# Altium PCB CMTestBoard.PcbDoc (part 2 of 2)
Units mil, origin at the board's own origin, x right, y up, seen from the top; angles counter-clockwise.
Board outline 3790 x 3730 mil, 4 copper layers (Top Layer, Layer 1, Layer 2, Bottom Layer), stack 22.4 mil thick; 114 components, 108 nets, 634 pads, 218 vias.
Unrouted connection lines stored in the file: 45.
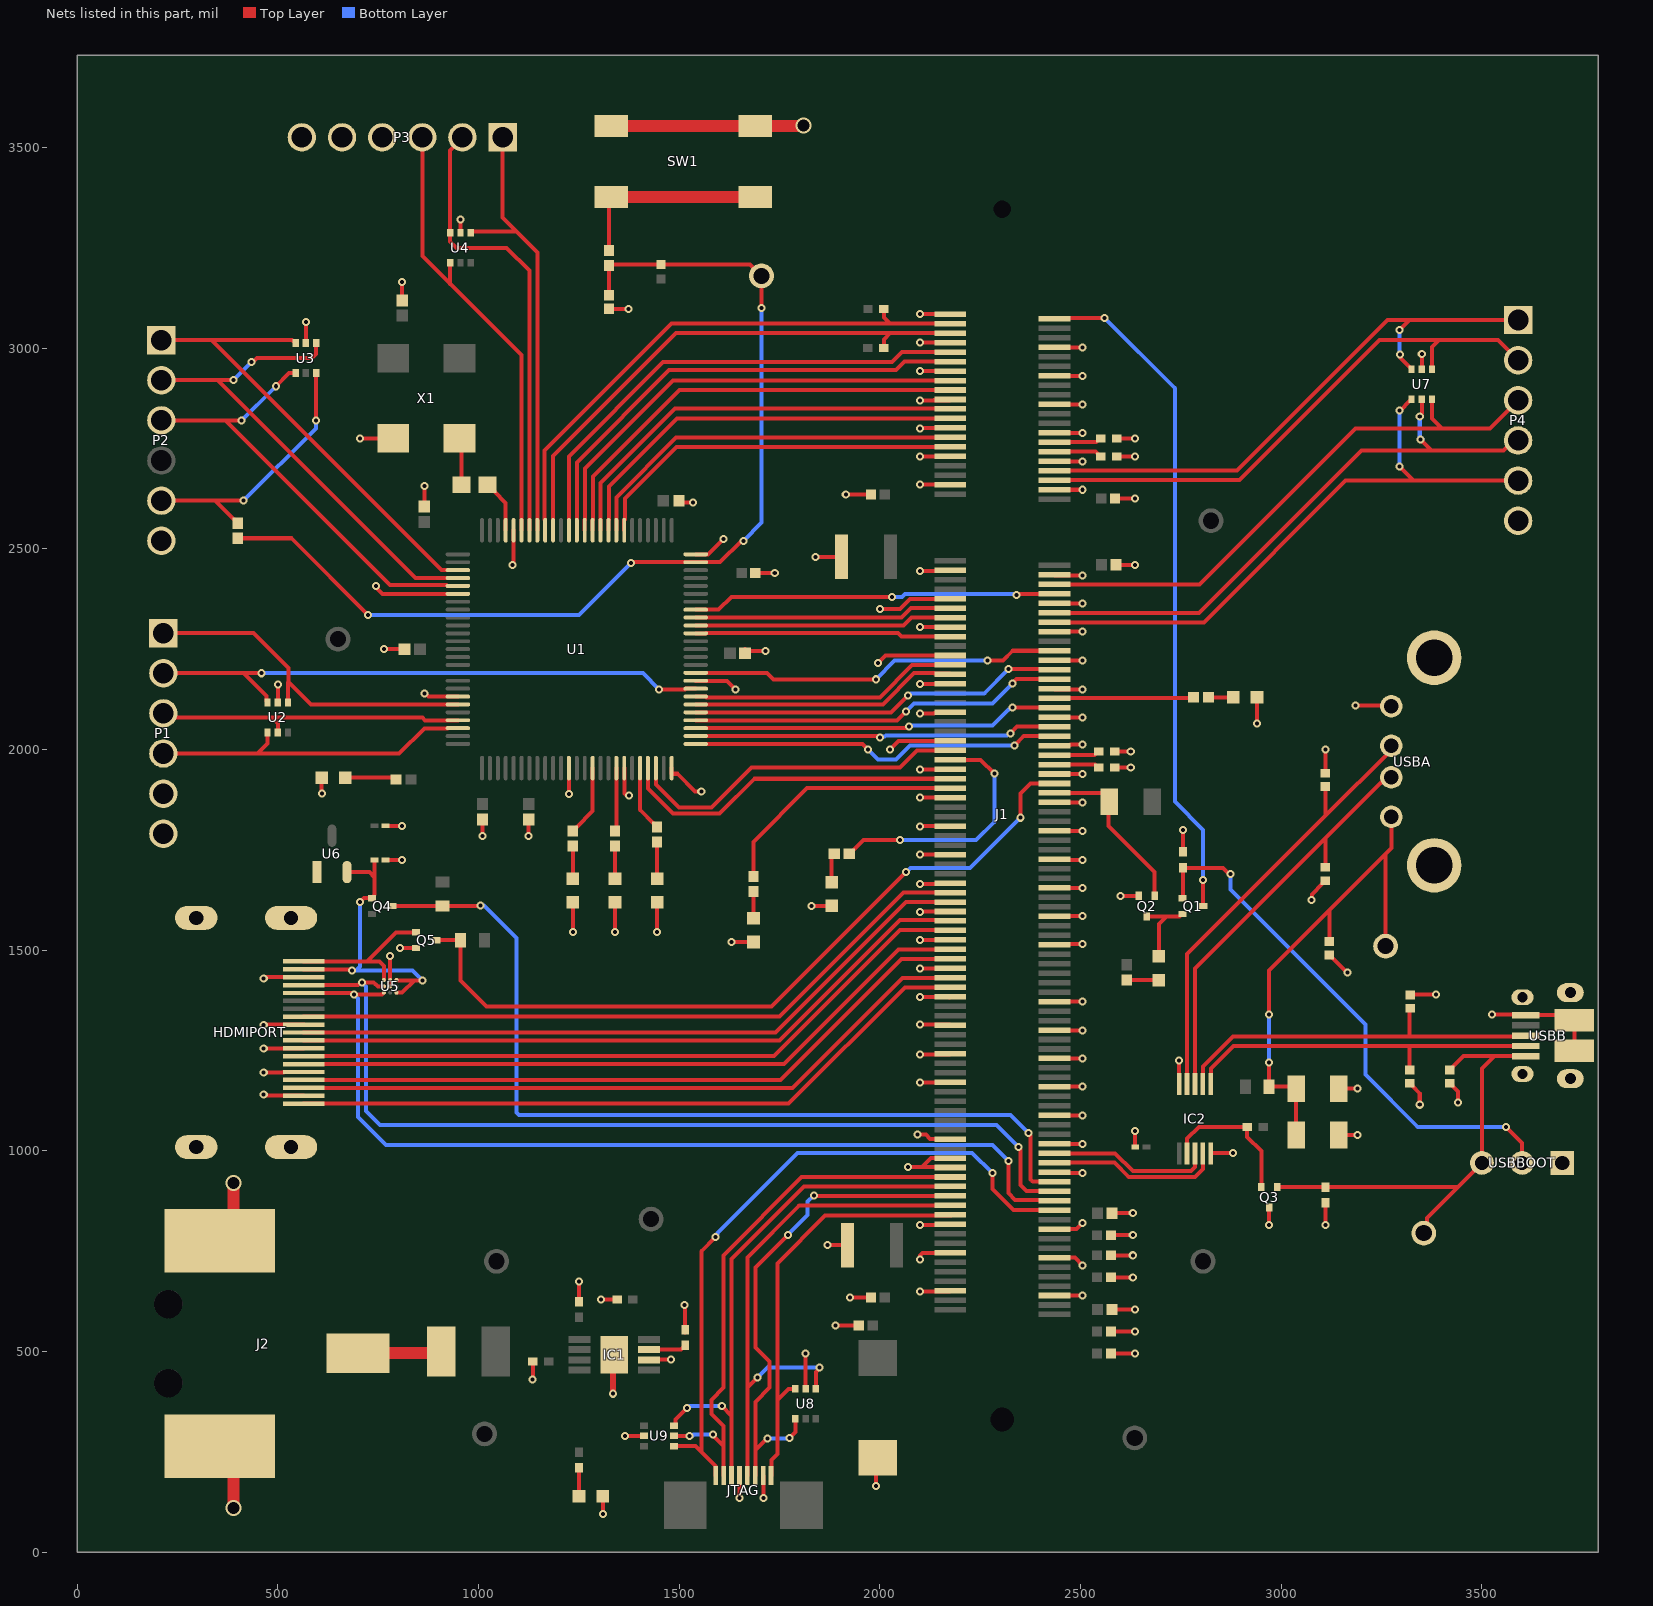
[diagram p2: the nets of this part, all layers, seen from the top]

## Via types
v1: diameter 20, hole 10, Top Layer to Bottom Layer, 215 vias
v2: diameter 40, hole 30, Top Layer to Bottom Layer, 3 vias

## Nets (pads, with @x,y where several pads share a name; then routed paths per layer and width w, separated by ;. In a path a pad name is that pad's centre, name@x,y a point inside that pad or via, vN(x,y) a via of type N, cw(c..) or ccw(c..) an arc to the next point about the centre after c; other vN are vias at no path point) (continued)
EMMC_DISABLE_IN: J1.2 Q1.3 | length 1692.6
  Top Layer w10: J1.2@2435,3072.8 2436.89,3074.69 2474.91,3074.69 2475.23,3075 v1(2560,3075) ; v1(2805,1675) 2805.59,1674.41 Q1.3@2805.59,1610
  Bottom Layer w10: v1(2560,3075) 2735,2900 2735,1870 2805,1800 v1(2805,1675)
EMMC_EN_N1.8V: J1.90 Q2.1 R18.1 | length 429.9
  Top Layer w10: J1.90@2435,1891.69 2555.2,1891.69 2570,1876.89 2570,1810 2684.68,1695.32 Q2.1@2684.68,1635.59
GCK1: SJ1.2 U1.22 | length 133.7
  Top Layer w10: SJ1.2@1022.48,2660 1024.45,2660 1040.12,2644.33 1040.12,2642.36 1067.83,2614.65 U1.22@1067.83,2546.26
GND: C1.1 C2.1 C3.1 C4.1 C5.1 C6.2 C7.2 C8.2 C9.2 C10.1 C11.2 C12.2 C13.2 C14.2 C15.1 C16.2 C17.2 C18.2 C19.2 C20.1 C21.1 C22.1 C23.1 C24.1 C25.1 C26.1 C27.1 C28.1 C29.1 C30.1 C31.1 C32.2 C33.2 D1.2 D2.2 D3.2 D4.2 D5.2 D6.2 DS1.2 DS2.2 DS3.2 DS4.1 DS5.1 DS6.1 HDMIPORT.2 HDMIPORT.5 HDMIPORT.8 HDMIPORT.11 HDMIPORT.17 HDMIPORT.Shell IC1.2 IC1.9 IC2.5 IC2.10 J1.1 J1.7 J1.8 J1.13 J1.14 J1.19 J1.20 J1.25 J1.26 J1.31 J1.32 J1.37 J1.38 J1.43 J1.44 J1.49 J1.50 J1.55 J1.56 J1.61 J1.62 J1.67 J1.68 J1.73 J1.74 J1.79 J1.80 J1.85 J1.86 J1.91 J1.92 J1.97 J1.98 J1.103 J1.104 J1.109 J1.110 J1.115 J1.116 J1.121 J1.122 J1.127 J1.133 J1.134 J1.139 J1.140 J1.145 J1.146 J1.151 J1.152 J1.157 J1.163 J1.164 J1.168 J1.169 J1.170 J1.181 J1.182 J1.187 J1.188 J1.195 J1.196 J2.2 J2.3 JTAG.4 JTAG.7 P1.5 P1.6 P2.6 P3.4 P3.5 P3.6 P4.6 PWR1.2 PWR2.2 Q2.2 Q3.3 Q5.2 R1.2 R2.2 R3.2 R4.2 R17.1 R22.1 SW1.3 SW1.4 U1.21 U1.31 U1.44 U1.62 U1.69 U1.75 U1.84 U1.100 U2.2 U3.2 U4.2 U5.B2 U5.C2 U6.1 U7.2 U8.2 U9.2 USBA.4 USBA.Shell USBB.5 USBB.6 USBB.7 USBB.8 USBB.9 USBB.10 USBB.11 USBBOOT.1 X1.2 | length 11160.8
  Top Layer w10: J2.3@355.31,264.09 J2.3@359.41,260 ; v1@463.34,1255.38 v1@463.72,1255 ; v1@463.81,1195.53 v1@464.86,1196.57 ; v1(465,1140) 467.71,1140 470.19,1137.52 HDMIPORT.2@564.64,1137.52 ; v1(465,1195.53) 513.97,1195.53 514.51,1196.06 564.13,1196.06 HDMIPORT.5@564.64,1196.57 ; v1(465,1255.38) 563.88,1255.38 564.13,1255.12 HDMIPORT.8@564.64,1255.63 ; v1(465,1313.25) 466.43,1314.68 HDMIPORT.11@564.64,1314.68 HDMIPORT.11@564.91,1314.42 ; v1(465,1430) 467.71,1430 470.5,1432.8 HDMIPORT.17@564.64,1432.8 ; U2.2@500,2117.5 v1(500,2162.5) ; U3.2@570,3012.4 v1@570,3063.89 ; PWR2.2@609.17,1930 609.17,1890.83 v1(610,1890) ; v1(705,2775) X1.2@787.32,2775 ; v1(745,2406.83) 745,2403.65 760.86,2387.8 U1.31@948.74,2387.8 ; v1(765,2250) C25.1@816.1,2250 ; C33.2@768.78,1725 v1(810,1725) ; C32.2@768.78,1810 v1(810,1810) ; U5.B2@780,1410 U5.C2@780,1425.75 v1(780,1485) ; v1(805,1505) 805.31,1505.31 Q5.2@844.41,1505.31 ; C28.1@810,3118.9 v1(810,3165) ; v1(865,2140) 867.71,2140 875.82,2131.89 U1.44@948.74,2131.89 ; C26.1@865,2605 v1(865,2656.1) ; U4.2@955,3287.4 v1(955,3320) ; v1(1010,1785) C24.1@1010,1826.1 ; v1(1085,2460) 1085,2462.71 1087.52,2465.23 U1.21@1087.52,2546.26 ; v1(1125,1785) C23.1@1125,1826.1 ; v1(1135,430) 1135.32,430.32 C3.1@1135.32,475 ; v1(1225,1889.31) 1225.32,1889.62 U1.62@1225.32,1953.74 ; v1(1235,1545) DS1.2@1235,1619.17 ; C1.1@1250,624.68 v1(1250,675) ; v1(1305,630) C4.1@1345.32,630 ; v1(1310,95) PWR1.2@1310,139.53 ; C27.1@1325,3098.07 1325.2,3097.87 v1(1373.65,3097.87) ; v1(1340,1545) DS2.2@1340,1619.17 ; U1.69@1363.27,1953.58 1363.27,1939.92 1363.33,1938.15 1363.33,1890.91 1369.24,1885 v1(1375,1885) ; v1(1365,290) U9.2@1412.6,290 ; IC1.2@1425,479.41 1425.59,480 v1(1480,480) ; v1(1445,1545) DS3.2@1445,1619.17 ; U1.75@1481.22,1953.74 1481.22,1939.68 1481.3,1939.6 1495.36,1939.6 1539.8,1895.16 1554.84,1895.16 v1(1555,1895) ; C20.1@1500,2615 v1(1535,2615) ; v1(1513.75,616.25) 1515,615 C2.1@1515,547.63 ; U1.84@1541.26,2171.26 1618.74,2171.26 v1(1640,2150) ; U1.100@1541.26,2486.22 1571.22,2486.22 v1(1610,2525) ; v1(1630,1520) 1684.53,1520 DS5.1@1685,1520.47 ; v1(1650,135) 1650.16,135.16 JTAG.4@1650.16,190.79 JTAG.4@1650.71,191.34 ; C22.1@1663.9,2250 1668.9,2245 v1(1715,2245) ; C21.1@1690,2440 v1(1738.07,2440) ; JTAG.7@1708.9,191.1 JTAG.7@1709.21,190.79 1710,190 v1(1710,135) ; U8.2@1815,407.4 v1(1815,495) ; v1(1830,1610) 1879.53,1610 DS6.1@1880,1610.47 ; v1(1840,2480) C14.2@1903.98,2480 ; v1(1870,765) C19.2@1918.98,765 ; v1(1890,565) C7.2@1947.68,565 C7.2@1950.56,565 ; v1(1915,2635) C13.2@1977.68,2635 ; v1(1925,635) C12.2@1977.68,635 ; v1(1990,165) 1990,230.98 C9.2@1995,235.98 ; v1(1995,2215) 2014.21,2234.21 J1.61@2175.16,2234.21 ; v1(2000,2350) 2050,2350 2075,2375 2174.21,2375 J1.49@2175.16,2375.94 ; v1(2025,2000) 2046.61,2021.61 J1.79@2175.16,2021.61 ; v1(2070,960) 2105,960 ; v1(2094.27,1040.39) 2114.61,1040.39 2125,1030 2174.65,1030 J1.164@2175.16,1029.49 ; v1@2098.86,1383.62 v1(2100,1383.62) J1.133@2173.27,1383.62 ; v1@2099.77,2162.98 2100.13,2163.35 J1.67@2175.16,2163.35 ; v1(2100,650) 2173.62,650 J1.196@2175.16,651.54 ; v1(2100,730) 2100,740 2106.02,746.02 J1.188@2175.16,746.02 ; v1(2100,815) 2173.27,815 J1.182@2175.16,816.89 ; v1(2100,1170) 2173.94,1170 J1.152@2175.16,1171.22 ; v1(2100,1240) 2134.93,1240 2135.13,1240.2 2173.27,1240.2 J1.146@2175.16,1242.09 ; v1(2100,1315) 2134.93,1315 2135.09,1314.84 2173.27,1314.84 J1.139@2175.16,1312.95 ; v1(2100,1455) 2174.84,1455 J1.127@2175.16,1454.68 ; v1(2100,1525) 2174.61,1525 J1.121@2175.16,1525.55 ; v1(2100,1595) 2101.42,1596.42 J1.115@2175.16,1596.42 ; v1(2100,1665) 2134.93,1665 2135.32,1665.39 2173.27,1665.39 J1.109@2175.16,1667.28 ; v1(2100,1880) 2100.12,1879.88 J1.91@2175.16,1879.88 ; v1(2100,1950) 2100.75,1950.75 J1.85@2175.16,1950.75 ; v1(2100,2090) 2134.93,2090 2135.52,2090.59 2173.27,2090.59 J1.73@2175.16,2092.48 ; v1(2100,2305) 2175.08,2305 J1.55@2175.16,2305.08 ; v1(2100,2445) 2173.35,2445 J1.43@2175.16,2446.81 ; v1(2100,2660) 2174.57,2660 J1.37@2175.16,2659.41 ; v1(2100,2730) 2174.88,2730 J1.31@2175.16,2730.28 ; v1(2100,2800) 2101.14,2801.14 J1.25@2175.16,2801.14 ; v1(2100,2870) 2134.93,2870 2135.05,2870.12 2173.27,2870.12 J1.19@2175.16,2872.01 ; v1(2100,2943.33) 2100.46,2942.87 J1.13@2175.16,2942.87 ; v1(2100,3013.79) 2100.05,3013.74 J1.7@2175.16,3013.74 ; v1(2100,3085) 2100.39,3084.61 J1.1@2175.16,3084.61 ; v1@2100.53,1738.25 2100.63,1738.15 J1.103@2175.16,1738.15 ; v1@2100.72,1807.9 2101.84,1809.02 J1.97@2175.16,1809.02 ; J1.133@2173.27,1381.93 J1.133@2175.16,1383.82 ; J1.170@2175.16,958.62 2173.78,960 2105,960 ; J1.168@2175.16,982.24 2127.24,982.24 2105,960 ; J1.195@2435,639.72 2435.28,640 v1(2505,640) ; J1.187@2435,734.21 2485.79,734.21 v1(2505,715) ; J1.181@2435,805.08 2490.08,805.08 v1(2505,820) ; J1.169@2435,946.81 2436.81,945 v1@2500,945 ; J1.163@2435,1017.68 2435.15,1017.53 v1@2502.55,1017.53 ; J1.157@2435,1088.54 2500.9,1088.54 v1@2501.44,1088 ; J1.151@2435,1159.41 2435.59,1160 v1@2500,1160 ; J1.145@2435,1230.28 2435.28,1230 v1@2500,1230 ; J1.140@2435,1301.14 2436.14,1300 v1@2500,1300 ; J1.134@2435,1372.01 v1@2498.5,1372.02 ; J1.122@2435,1513.74 2436.26,1515 v1(2505,1515) ; J1.116@2435,1584.61 2435.39,1585 v1(2505,1585) ; J1.110@2435,1655.47 2435.47,1655 v1(2505,1655) ; J1.104@2435,1726.34 2436.34,1725 v1(2505,1725) ; J1.98@2435,1797.2 2435.5,1796.71 v1(2505,1796.71) ; J1.92@2435,1868.07 2435.41,1867.66 v1(2505,1867.66) ; J1.86@2435,1938.94 J1.86@2435,1938.94 v1(2505,1938.89) ; J1.80@2435,2009.8 2436.89,2011.69 2474.47,2011.69 2475.23,2012.45 v1(2505,2012.45) ; J1.74@2435,2080.67 2435.67,2080 v1(2505,2080) ; J1.68@2435,2151.54 2436.54,2150 v1(2505,2150) ; J1.62@2435,2222.4 2435.58,2221.82 v1(2505,2221.82) ; J1.56@2435,2293.27 2435.45,2293.72 v1(2505,2293.72) ; J1.50@2435,2364.13 2435.19,2363.95 v1(2505,2363.95) ; J1.44@2435,2435 2436.15,2433.85 v1(2505,2433.85) ; J1.38@2435,2647.6 2435.46,2647.14 v1(2505,2647.14) ; J1.32@2435,2718.46 2435.55,2717.91 v1(2505,2717.91) ; J1.26@2435,2789.33 2435.38,2788.95 v1(2505,2788.95) ; J1.20@2435,2860.2 2435.2,2860 v1(2505,2860) ; J1.14@2435,2931.06 2435.29,2930.77 v1(2505,2930.77) ; J1.8@2435,3001.93 2435.39,3001.54 v1(2505,3001.54) ; C18.2@2577.32,685 v1(2630,685) ; C17.2@2577.32,740 v1(2630,740) ; C16.2@2577.32,790 v1(2630,790) ; C15.1@2578.11,845 v1(2630,845) ; C8.2@2582.32,495 v1(2635,495) ; C6.2@2582.32,550 v1(2635,550) ; C5.1@2583.11,605 v1(2635,605) ; R4.2@2584.69,1955 v1(2625,1955) ; R3.2@2584.69,1995 v1(2625,1995) ; C11.2@2585.94,2625 v1(2635,2625) ; C10.1@2588.31,2460 v1(2635,2460) ; R2.2@2589.69,2730 v1(2635,2730) ; R1.2@2589.69,2775 v1(2635,2775) ; v1(2600,1635) 2644.72,1635 Q2.2@2645.31,1635.59 ; v1(2635,1050) 2635,1010.91 2635.91,1010 C29.1@2636.22,1010 ; v1(2745,1225) 2745,1167.24 IC2.10@2745.63,1166.61 ; R17.1@2755,1744.68 v1(2755,1800) ; IC2.5@2824.37,993.39 2824.37,994.09 2825.28,995 v1(2880,995) ; DS4.1@2939.53,2130 2940,2129.53 v1(2940,2065) ; v1(2970,815) Q3.3@2970,859.41 ; v1(3075,1625) 3076.04,1626.04 3076.04,1639.31 3103.19,1666.46 3103.19,1667.44 3109.02,1673.27 D2.2@3110,1673.27 ; v1(3110,815) R22.1@3110,870.32 ; D3.2@3110,1941.22 v1(3110,2000) ; D1.2@3120,1488.27 3120.98,1488.27 3126.81,1482.44 3126.81,1481.46 3163.27,1445 v1(3165,1445) ; C30.1@3143.15,1040 v1(3190,1040) ; C31.1@3143.15,1155 v1(3190,1155) ; v1(3185,2110) 3271.97,2110 USBA.4@3274.17,2107.8 ; D5.2@3320,1168.27 3320.98,1168.27 3326.81,1162.44 3326.81,1161.46 3345,1143.27 v1(3345,1115) ; D6.2@3320.87,1388.48 3322.38,1390 v1(3385,1390) ; U7.2@3350,2947.4 v1(3350,2985) ; D4.2@3420,1168.27 3420.98,1168.27 3426.81,1162.44 3426.81,1161.46 3440,1148.27 v1(3440,1120) ; v1(3525,1340) 3607.22,1340 USBB.5@3608.94,1338.29 3716.71,1338.29 USBB.11@3730,1325 USBB.10@3730,1249.21
  Top Layer w15: PWR1.2@1309.53,140 PWR1.2@1310,139.53 ; v1(1335,395) IC1.9@1335,488.82
  Top Layer w30: J2.2@355.31,775.91 390,810.59 v2(390,920) ; J2.3@359.41,260 400,219.41 390,209.41 v2(390,110) ; SW1.3@1330.5,3553.5 SW1.4@1689.5,3553.5 1808.5,3553.5 v2(1810,3555) ; IC1.9@1335,488.82 IC1.9@1338.39,492.2
  other v1: 2505,945 2505,1017.53 2505,1088 2505,1160 2505,1230 2505,1300 2505,1372.02 2100,1738.25 2100,1807.9 2100,2162.98 570,3065
GP1: J1.34 P4.1 U7.3 | length 1456
  Top Layer w10: J1.34@2435,2694.84 2889.84,2694.84 3265,3070 3320,3070 ; v1(3295,3045) 3320,3070 ; v1(3296.25,2983.75) 3296.25,2976.74 3325,2947.99 U7.3@3324.41,2947.4 ; P4.1@3590,3070 3320,3070
  Bottom Layer w10: v1(3295,3045) 3295,2985 v1(3296.25,2983.75)
GP2: J1.36 P4.2 U7.1 | length 1399.8
  Top Layer w10: J1.36@2435,2671.22 2896.22,2671.22 3245,3020 3392.5,3020 ; U7.1@3375.59,2947.4 3375.59,3003.09 3392.5,3020 ; P4.2@3590,2970 3540,3020 3392.5,3020
GP3: J1.46 P4.3 U7.6 | length 1427.7
  Top Layer w10: J1.46@2435,2411.38 2796.38,2411.38 3185,2800 3400,2800 ; U7.6@3375.59,2872.6 3375.59,2824.41 3400,2800 ; P4.3@3590,2870 3520,2800 3400,2800
GP4: J1.52 P4.4 U7.5 | length 1479.5
  Top Layer w10: J1.52@2435,2340.51 2795.51,2340.51 3200,2745 3374.16,2745 ; v1(3345,2830) 3345,2832.71 3350,2837.71 U7.5@3350,2872.6 ; v1(3347.12,2772.04) 3374.16,2745 ; P4.4@3590,2770 3578.71,2770 3553.71,2745 3374.16,2745
  Bottom Layer w10: v1(3345,2830) 3345,2780.1 3351.3,2773.8 3349.54,2772.04 v1(3347.12,2772.04)
GP5: J1.54 P4.5 U7.4 | length 1532.8
  Top Layer w10: J1.54@2435,2316.89 2806.89,2316.89 3160,2670 3330,2670 ; v1(3295,2705) 3330,2670 ; v1(3295,2845) 3296.81,2845 3319.57,2867.76 3321.54,2867.76 3324.41,2870.63 U7.4@3324.41,2872.6 ; P4.5@3590,2670 3330,2670
  Bottom Layer w10: v1(3295,2705) v1(3295,2845)
GP6: P3.1 U1.18 U4.1 | length 1130.1
  Top Layer w10: U4.1@980.59,3287.4 983.19,3290 1095,3290 ; P3.1@1060,3525 1060,3325 1095,3290 ; U1.18@1146.57,2546.26 1146.57,3238.43 1095,3290
GP7: P3.2 U1.19 U4.3 | length 1146.4
  Top Layer w10: P3.2@960,3525 960,3523.14 929.41,3492.55 U4.3@929.41,3287.4 929.41,3265.59 945,3250 1070,3250 1126.89,3193.11 U1.19@1126.89,2546.26
GP8: P3.3 U1.20 U4.4 | length 1133.7
  Top Layer w10: P3.3@860,3525 860,3230 929.41,3160.59 ; 929.41,3160 929.41,3160.59 ; U4.4@929.41,3212.6 929.41,3160.59 ; U1.20@1107.2,2546.26 1107.2,2982.8 929.41,3160.59
GPS_EN: J1.57 U1.90 | length 637.7
  Top Layer w10: U1.90@1541.26,2289.37 1566.69,2289.37 1567.32,2290 2045,2290 2053.54,2281.46 J1.57@2175.16,2281.46
GPS_RX_3.3: J1.53 U1.91 | length 642
  Top Layer w10: U1.91@1541.26,2309.06 2059.06,2309.06 2078.7,2328.7 J1.53@2175.16,2328.7
GPS_TX_3.3: J1.51 U1.92 | length 643.7
  Top Layer w10: U1.92@1541.26,2328.74 2053.74,2328.74 2077.32,2352.32 J1.51@2175.16,2352.32
H5V: C33.1 HDMIPORT.18 Q4.1 U5.A1 U5.C1 U6.2 | length 819.5
  Top Layer w10: HDMIPORT.18@564.64,1452.48 681.17,1452.48 683.65,1450 v1(685,1450) ; U6.2@672.4,1694.7 728.23,1694.7 741.22,1681.71 ; v1(705,1620) 714.68,1629.68 Q4.1@734.41,1629.68 736.57,1629.68 739.45,1632.56 739.45,1636.65 741.22,1638.42 741.22,1681.71 ; C33.1@741.22,1725 741.22,1681.71 ; U5.A1@795.75,1394.25 809.25,1394.25 840,1425 v1(860,1425) 796.5,1425 U5.C1@795.75,1425.75
  Bottom Layer w10: v1(705,1620) 705,1460 695,1450 835,1450 v1(860,1425)
HDMI_CEC: J1.171 Q4.3 R24.1 | length 2254.5
  Top Layer w10: Q4.3@785.59,1610 786.06,1610.47 R24.1@910,1610.47 1004.12,1610.47 v1(1005.25,1611.6) ; v1(2370,1045) 2370,1042.29 2375,1037.29 2375,929.05 2380.86,923.19 J1.171@2435,923.19
  Bottom Layer w10: v1(1005.25,1611.6) 1013.4,1611.6 1095,1530 1095,1095.86 1100.86,1090 2325,1090 v1(2370,1045)
HDMI_CLK_N: HDMIPORT.12 J1.111 | length 1738.6
  Top Layer w10: HDMIPORT.12@564.64,1334.37 1749.37,1334.37 2058.66,1643.66 J1.111@2175.16,1643.66
HDMI_CLK_P: HDMIPORT.10 J1.113 | length 1745.1
  Top Layer w10: HDMIPORT.10@564.64,1295 1740.35,1295 2065.35,1620 2175.12,1620 J1.113@2175.16,1620.04
HDMI_D0_N: HDMIPORT.9 J1.117 | length 1735.6
  Top Layer w10: HDMIPORT.9@564.64,1275.31 1750.31,1275.31 2050,1575 2134.93,1575 2135.24,1574.69 2173.27,1574.69 J1.117@2175.16,1572.8
HDMI_D0_P: HDMIPORT.7 J1.119 | length 1740.9
  Top Layer w10: HDMIPORT.7@564.64,1235.94 1735.94,1235.94 2050,1550 2174.33,1550 J1.119@2175.16,1549.17
HDMI_D1_N: HDMIPORT.6 J1.123 | length 1728.8
  Top Layer w10: HDMIPORT.6@564.64,1216.26 1761.26,1216.26 2046.93,1501.93 J1.123@2175.16,1501.93
HDMI_D1_P: HDMIPORT.4 J1.125 | length 1735.4
  Top Layer w10: HDMIPORT.4@564.64,1176.89 1751.89,1176.89 2053.31,1478.31 J1.125@2175.16,1478.31
HDMI_D2_N: HDMIPORT.3 J1.129 | length 1723.9
  Top Layer w10: HDMIPORT.3@564.64,1157.2 1782.2,1157.2 2056.06,1431.06 J1.129@2175.16,1431.06
HDMI_D2_P: HDMIPORT.1 J1.131 | length 1730.5
  Top Layer w10: HDMIPORT.1@564.64,1117.83 1772.83,1117.83 2062.44,1407.44 J1.131@2175.16,1407.44
HDMI_HPD_N_1V8: J1.88 Q5.3 R23.1 | length 1931.8
  Top Layer w10: Q5.3@895.59,1525 R23.1@955.47,1525 955.47,1424.53 1020,1360 1730,1360 v1(2065,1695) ; v1(2350,1830) 2350,1890 2375.32,1915.32 J1.88@2435,1915.32
  Bottom Layer w10: v1(2065,1695) 2065.86,1695 2075.86,1705 2225,1705 v1(2350,1830)
HDMI_SCL: HDMIPORT.15 J1.175 U5.A3 | length 2380.4
  Top Layer w10: HDMIPORT.15@564.64,1393.43 685.22,1393.43 688.65,1390 v1(690,1390) 691.35,1390 692.31,1390 694.78,1390 760,1390 U5.A3@764.25,1394.25 ; v1(2320,975) 2320,895 2337.05,877.95 2394.77,877.95 2394.89,877.83 2433.11,877.83 J1.175@2435,875.94
  Bottom Layer w10: v1(690,1390) 700,1380 700,1085 770,1015 2280,1015 v1(2320,975)
HDMI_SDA: HDMIPORT.16 J1.173 U5.B3 | length 2382.3
  Top Layer w10: HDMIPORT.16@564.64,1413.11 700.4,1413.11 707.29,1420 v1(710,1420) 738.09,1420 744.04,1414.04 745,1415 750,1410 U5.B3@764.25,1410 ; v1(2345,1010) 2345,1007.29 2350,1002.29 2350,915 2365.43,899.57 J1.173@2435,899.57
  Bottom Layer w10: v1(710,1420) 710,1419.14 720,1409.14 720,1100 755,1065 2290,1065 v1(2345,1010)
HPD: HDMIPORT.19 Q5.1 U5.C3 | length 391.6
  Top Layer w10: HDMIPORT.19@564.64,1472.17 722.17,1472.17 ; U5.C3@764.25,1425.75 764.25,1460.75 752.84,1472.17 722.17,1472.17 ; Q5.1@844.41,1544.68 794.68,1544.68 722.17,1472.17
HSD1+: D6.1 IC2.7 USBB.3 | length 949.8
  Top Layer w10: IC2.7@2804.68,1166.61 2804.68,1209.68 2880,1285 3320,1285 ; D6.1@3320.87,1355.02 3320,1354.15 3320,1285 ; USBB.3@3608.94,1287.11 3606.83,1285 3320,1285
HSD1-: D5.1 IC2.6 USBB.2 | length 905.8
  Top Layer w10: IC2.6@2824.37,1166.61 2825,1167.24 2825,1205 2881.52,1261.52 3320,1261.52 ; D5.1@3320,1201.73 3320,1261.52 ; USBB.2@3608.94,1261.52 3320,1261.52
HSD2+: D3.1 IC2.9 USBA.3 | length 1126.3
  Top Layer w10: IC2.9@2765.32,1166.61 2765.32,1490.32 3110,1835 ; D3.1@3110,1907.76 3110,1835 ; USBA.3@3274.17,2009.37 3274.17,1999.17 3110,1835
HSD2-: D2.1 IC2.8 USBA.2 | length 1047.8
  Top Layer w10: IC2.8@2785,1166.61 2785,1455 3110,1780 ; D2.1@3110,1706.73 3110,1780 ; USBA.2@3274.17,1930.63 3261.75,1930.63 3248.15,1917.03 3247.03,1917.03 3110,1780
LED1: R13.2 U1.65 | length 177.4
  Top Layer w10: R13.2@1235,1797.4 1235,1798.39 1242.8,1806.18 1243.78,1806.18 1284.37,1846.77 U1.65@1284.37,1953.74
LED2: R14.2 U1.68 | length 157.8
  Top Layer w10: R14.2@1340,1797.4 1343.43,1800.83 U1.68@1343.43,1953.74
LED3: R15.2 U1.71 | length 164.5
  Top Layer w10: U1.71@1402.48,1953.74 1402.48,1849.92 1436.22,1816.18 1437.2,1816.18 1445,1808.39 R15.2@1445,1807.4
LED4: J1.70 R25.2 | length 347.2
  Top Layer w10: J1.70@2435,2127.91 2779.21,2127.91 R25.2@2781.3,2130
LED5: J1.89 R26.2 | length 631.8
  Top Layer w10: R26.2@1685,1683.7 1685,1770 1818.5,1903.5 J1.89@2175.16,1903.5
LED6: J1.83 R27.2 | length 639.1
  Top Layer w10: R27.2@1923.7,1740 1924.69,1740 1932.48,1747.8 1932.48,1748.78 1958.7,1775 v1(2050,1775) ; J1.83@2175.16,1974.37 2250.63,1974.37 v1(2285,1940)
  Bottom Layer w10: v1(2050,1775) 2240,1775 2285,1820 v1(2285,1940)
MISO: J1.60 U1.85 | length 929.8
  Top Layer w10: U1.85@1541.26,2190.94 1719.06,2190.94 1735,2175 v1(1990,2175) ; v1(2267.7,2221.74) 2306.74,2221.74 2331.02,2246.02 J1.60@2435,2246.02
  Bottom Layer w10: v1(1990,2175) 2036.74,2221.74 v1(2267.7,2221.74)
MISO2: P2.3 U1.30 U3.4 | length 1137.3
  Top Layer w10: P2.3@210,2820 370,2820 ; v1(410,2820) 370,2820 ; v1(495,2905) 527.39,2937.39 544.2,2937.39 U3.4@544.41,2937.6 ; U1.30@948.74,2407.48 923.31,2407.48 920.79,2410 780,2410 370,2820
  Bottom Layer w10: v1(410,2820) 490,2900 492.29,2900 497.29,2905 v1(495,2905)
MOSI: J1.64 U1.80 | length 938.8
  Top Layer w10: U1.80@1541.26,2092.52 2027.52,2092.52 v1(2070,2135) ; v1(2320,2200) 2433.78,2200 J1.64@2435,2198.78
  Bottom Layer w10: v1(2070,2135) 2072.71,2135 2077.71,2140 2260,2140 v1(2320,2200)
MOSI2: P2.2 U1.29 U3.1 | length 1242.4
  Top Layer w10: P2.2@210,2920 350,2920 ; v1(390,2920) 350,2920 ; v1(435,2965) 437.71,2965 447.71,2975 585,2975 595.59,2985.59 U3.1@595.59,3012.4 ; U1.29@948.74,2427.17 842.83,2427.17 350,2920
  Bottom Layer w10: v1(390,2920) v1(435,2965)
NetC2_2: C2.2 IC1.3 | length 95.4
  Top Layer w10: IC1.3@1425,505 1504.69,505 1508.19,508.5 1510.16,508.5 1515,513.35 C2.2@1515,515.31
NetDS1_1: DS1.1 R13.1 | length 81.8
  Top Layer w10: DS1.1@1235,1678.23 R13.1@1235,1760
NetDS2_1: DS2.1 R14.1 | length 81.8
  Top Layer w10: DS2.1@1340,1678.23 R14.1@1340,1760
NetDS3_1: DS3.1 R15.1 | length 91.8
  Top Layer w10: DS3.1@1445,1678.23 R15.1@1445,1770
NetDS4_2: DS4.2 R25.1 | length 61.8
  Top Layer w10: R25.1@2818.7,2130 DS4.2@2880.47,2130
NetDS5_2: DS5.2 R26.1 | length 66.8
  Top Layer w10: DS5.2@1685,1579.53 R26.1@1685,1646.3
NetDS6_2: DS6.2 R27.1 | length 66.8
  Top Layer w10: DS6.2@1880,1669.53 R27.1@1880,1736.3
NetDS7_1: DS7.1 R19.1 | length 80.3
  Top Layer w10: R19.1@2615,1426.3 2694.17,1426.3 DS7.1@2695,1425.48
NetF1_1: F1.1 J2.1 | length 208.8
  Top Layer w30: J2.1@699.8,496.38 903.46,496.38 F1.1@907.09,500
NetJ1_28: J1.28 R1.1 | length 119.2
  Top Layer w10: J1.28@2435,2765.71 2539.06,2765.71 2548.35,2775 R1.1@2550.32,2775
NetJ1_30: J1.30 R2.1 | length 121.1
  Top Layer w10: J1.30@2435,2742.09 2537.65,2742.09 2543.5,2736.23 2543.5,2734.84 2548.35,2730 R2.1@2550.32,2730
NetJ1_82: J1.82 R3.1 | length 114
  Top Layer w10: J1.82@2435,1986.18 2534.53,1986.18 2543.35,1995 R3.1@2545.32,1995
NetJ1_84: J1.84 R4.1 | length 113.4
  Top Layer w10: J1.84@2435,1962.56 2535.79,1962.56 2543.35,1955 R4.1@2545.32,1955
NetPWR1_1: PWR1.1 R7.2 | length 70.5
  Top Layer w10: PWR1.1@1250,140.48 R7.2@1250,210.31
  Top Layer w30: PWR1.1@1250,140.48 PWR1.1@1250.48,140
NetPWR2_1: PWR2.1 R16.1 | length 128.8
  Top Layer w10: PWR2.1@668.23,1930 790,1930 R16.1@795,1925
NetQ1_1: Q1.1 R17.2 USBBOOT.2 | length 1350.7
  Top Layer w10: Q1.1@2754.41,1629.68 2755,1630.28 R17.2@2755,1705.31 2854.69,1705.31 2870,1690 v1(2873.75,1690) ; v1(3560,1060) 3600,1020 USBBOOT.2@3600,970
  Bottom Layer w10: v1(2873.75,1690) 2873.75,1651.25 3210,1315 3210,1190 3340,1060 v1(3560,1060)
NetR12_1: R12.1 SW1.1 SW1.2 | length 494.1
  Top Layer w10: R12.1@1325,3243.7 1325,3371 SW1.1@1330.5,3376.5
  Top Layer w30: SW1.1@1330.5,3376.5 SW1.2@1689.5,3376.5
NetSJ1_1: SJ1.1 X1.3 | length 117
  Top Layer w10: X1.3@952.68,2775 957.52,2770.16 SJ1.1@957.52,2660
RST: C27.2 R10.2 R11.1 R12.2 TP6.1 U1.99 | length 2561
  Top Layer w10: R10.2@400,2526.3 533.7,2526.3 v1(725,2335) ; C27.2@1325,3131.93 R12.2@1325,3206.3 1326.5,3207.8 R11.1@1455,3207.8 1676.17,3207.8 1703.97,3180 TP6.1@1705,3180 v1(1705,3100) ; v1(1380,2465) 1381.54,2466.54 U1.99@1541.26,2466.54 1601.54,2466.54 1655,2520 v1(1660,2520)
  Bottom Layer w10: v1(725,2335) 1250,2335 v1(1380,2465) ; v1(1660,2520) 1705,2565 v1(1705,3100)
RST_OUT: P2.5 R10.1 U3.6 | length 677.6
  Top Layer w10: P2.5@210,2620 343.7,2620 ; R10.1@400,2563.7 400,2564.69 392.2,2572.48 391.22,2572.48 343.7,2620 ; v1(415,2620) 343.7,2620 ; v1(595,2820) 595,2937.01 U3.6@595.59,2937.6
  Bottom Layer w10: v1(415,2620) 595,2800 v1(595,2820)
RUN: J1.177 JTAG.1 U9.4 | length 1714.7
  Top Layer w10: U9.4@1487.4,264.41 1540.59,264.41 1555,250 ; v1(1590,785) 1555,750 1555,250 ; JTAG.1@1591.1,190.79 1590.2,191.69 1590.2,214.8 1555,250 ; v1(2280,945) 2280,905 2332.68,852.32 J1.177@2435,852.32
  Bottom Layer w10: v1(1590,785) 1590,787.71 1595,792.71 1595,795 1795,995 2230,995 v1(2280,945)
SARA_EN: J1.48 U1.93 | length 912.3
  Top Layer w10: U1.93@1541.26,2348.43 1598.43,2348.43 1630,2380 v1(2030,2380) ; v1(2340,2385) 2342.71,2385 2345.46,2387.76 J1.48@2435,2387.76
  Bottom Layer w10: v1(2030,2380) 2055,2380 2062.71,2387.71 2334.59,2387.71 2337.29,2385 v1(2340,2385)
SCL: J1.5 R6.2 U1.16 | length 1344.5
  Top Layer w10: U1.16@1185.94,2546.26 1185.94,2730.94 1492.36,3037.36 2025,3037.36 ; R6.2@2009.69,3000 2009.69,3022.05 2025,3037.36 ; J1.5@2175.16,3037.36 2025,3037.36
SCLK: J1.66 U1.79 | length 936.1
  Top Layer w10: U1.79@1541.26,2072.83 2042.83,2072.83 v1(2065,2095) ; v1(2330,2165) 2330.7,2165 2340.86,2175.16 J1.66@2435,2175.16
  Bottom Layer w10: v1(2065,2095) 2085,2115 2280,2115 v1(2330,2165)
SCLK2: P2.1 U1.28 U3.3 | length 1189.9
  Top Layer w10: P2.1@210,3020 335,3020 ; U3.3@544.41,3012.4 544.41,3014.37 541.54,3017.24 538.43,3017.24 535.68,3020 335,3020 ; U1.28@948.74,2446.85 U1.28@948.74,2446.85 908.1,2446.9 335,3020
SDA: J1.3 R5.2 U1.17 | length 1382.7
  Top Layer w10: U1.17@1166.26,2546.26 1166.26,2571.69 1165,2572.95 1165,2745 1480.98,3060.98 2025,3060.98 ; R5.2@2009.76,3097.06 2009.76,3076.23 2025,3060.98 ; J1.3@2175.16,3060.98 2025,3060.98
SEL: IC2.2 Q3.2 R21.2 | length 363.4
  Top Layer w10: IC2.2@2765.32,993.39 2765.32,1030.32 2795,1060 R21.2@2915.31,1060 2915,1059.68 2915,1035 2950.31,999.69 Q3.2@2950.31,910.59
TC1: J1.63 U1.82 | length 668.1
  Top Layer w10: U1.82@1541.26,2131.89 1566.69,2131.89 1568.58,2130 2000,2130 2080.59,2210.59 J1.63@2175.16,2210.59
TC2: J1.65 U1.81 | length 667.4
  Top Layer w10: U1.81@1541.26,2112.2 2007.2,2112.2 2085,2190 2134.93,2190 2136.07,2188.86 2173.27,2188.86 J1.65@2175.16,2186.97
TC3: J1.81 U1.73 | length 857.2
  Top Layer w10: U1.73@1441.85,1953.74 1441.85,1913.15 1500,1855 1580,1855 1680,1955 2050,1955 2092.99,1997.99 J1.81@2175.16,1997.99
TC4: J1.87 U1.72 | length 866
  Top Layer w10: U1.72@1422.17,1953.74 1422.17,1902.83 1485,1840 1600,1840 1687.13,1927.13 J1.87@2175.16,1927.13
TC5: J1.29 U1.7 | length 943.1
  Top Layer w10: U1.7@1363.11,2546.26 1363.11,2571.69 1365,2573.58 1365,2625 1493.9,2753.9 J1.29@2175.16,2753.9
TCK: J1.180 JTAG.8 U8.3 | length 1075.5
  Top Layer w10: JTAG.8@1728.9,190.79 1729.8,191.69 1729.8,229.8 1745,245 1745,380 ; U8.3@1789.41,407.4 1772.39,407.39 1745,380 ; J1.180@2175.16,840.51 2177.05,838.62 1863.62,838.62 1745,720 1745,380
TDI: J1.174 JTAG.3 U9.6 | length 1340
  Top Layer w10: U9.6@1487.4,315.59 1488.09,315.59 1490.96,318.46 1490.96,330.96 v1(1520,360) ; v1(1606.07,364.34) 1630.47,339.93 ; JTAG.3@1630.47,190.79 1630.47,730.47 1811.38,911.38 J1.174@2175.16,911.38
  Bottom Layer w10: v1(1520,360) 1522.71,360 1527.05,364.34 v1(1606.07,364.34)
TDO: J1.178 JTAG.5 U8.1 | length 1362.4
  Top Layer w10: JTAG.5@1669.84,190.79 1670,190.94 1670,400 1670,410 ; v1(1695,435) 1670,410 ; U8.1@1840.59,407.4 1840.59,449.14 1850,458.55 v1(1850,460) ; J1.178@2175.16,864.13 1799.13,864.13 1670,735 1670,410
  Bottom Layer w10: v1(1695,435) 1722.8,462.8 1725.59,460 v1(1850,460)
TMS: J1.176 JTAG.6 U8.4 | length 1284.1
  Top Layer w10: JTAG.6@1689.53,190.79 1690,191.26 1690,255 ; v1(1719.62,283.23) 1718.23,283.23 1690,255 ; v1(1771.38,790) 1770.86,790 1690,709.14 1690,510 1725,475 1725,410 1690,375 1690,255 ; v1(1775,285) 1789.41,299.41 U8.4@1789.41,332.6 ; v1(1835.28,888.85) 1835.28,887.42 1837.71,885 1840.46,887.76 J1.176@2175.16,887.76
  Bottom Layer w10: v1(1719.62,283.23) 1773.23,283.23 v1(1775,285) ; v1(1771.38,790) 1770,790 1820,840 1820,873.56 v1(1835.28,888.85)
TOG1: J1.9 U1.14 | length 1241.8
  Top Layer w10: U1.14@1225.32,2546.26 1225.32,2571.69 1225,2572.01 1225,2730 1460,2965 2030,2965 2055.12,2990.12 J1.9@2175.16,2990.12
TOG2: J1.11 U1.13 | length 1203.1
  Top Layer w10: U1.13@1245,2546.26 1245,2715 1475,2945 2040,2945 2061.5,2966.5 J1.11@2175.16,2966.5
TOG3: J1.15 U1.12 | length 1154.8
  Top Layer w10: U1.12@1264.69,2546.26 1264.69,2571.69 1265,2572.01 1265,2700 1484.25,2919.25 J1.15@2175.16,2919.25
TOG4: J1.17 U1.11 | length 1113.5
  Top Layer w10: U1.11@1284.37,2546.26 1284.37,2571.69 1285,2572.32 1285,2680 1500.63,2895.63 J1.17@2175.16,2895.63
TOG5: J1.21 U1.10 | length 1066.6
  Top Layer w10: U1.10@1304.06,2546.26 1304.06,2664.06 1490,2850 2173.54,2850 J1.21@2175.16,2848.39
TOG6: J1.23 U1.9 | length 1029.7
  Top Layer w10: U1.9@1323.74,2546.26 1323.74,2571.69 1325,2572.95 1325,2655 1494.76,2824.76 J1.23@2175.16,2824.76
TOG7: J1.27 U1.8 | length 975.7
  Top Layer w10: U1.8@1343.43,2546.26 1343.43,2628.43 1492.52,2777.52 J1.27@2175.16,2777.52
TOG8: J1.78 U1.76 | length 934
  Top Layer w10: U1.76@1541.26,2013.78 1956.22,2013.78 v1(1970,2000) ; v1(2335,2010) 2358.43,2033.43 J1.78@2435,2033.43
  Bottom Layer w10: v1(1970,2000) 1995,1975 2040,1975 2075,2010 v1(2335,2010)
TOG9: J1.76 U1.77 | length 906.4
  Top Layer w10: U1.77@1541.26,2033.46 1993.83,2033.46 1997.29,2030 v1(2000,2030) ; v1(2325,2040) 2342.05,2057.05 J1.76@2435,2057.05
  Bottom Layer w10: v1(2000,2030) 2001.91,2031.91 2011.91,2031.91 2015,2035 2317.29,2035 2322.29,2040 v1(2325,2040)
TOG10: J1.72 U1.78 | length 919.1
  Top Layer w10: U1.78@1541.26,2053.15 2068.15,2053.15 2072.28,2057.28 v1(2072.28,2057.59) ; v1(2330,2105) 2434.29,2105 J1.72@2435,2104.29
  Bottom Layer w10: v1(2072.28,2057.59) 2072.28,2055.42 2072.71,2055 2077.71,2060 2280,2060 2320,2100 2322.29,2100 2327.29,2105 v1(2330,2105)
TRST_N: J1.172 JTAG.2 U9.5 | length 1357.1
  Top Layer w10: U9.5@1487.4,290 1487.57,290.17 v1(1526.23,290.17) ; v1(1584,293) 1584,291 1610,265 ; JTAG.2@1610.79,190.79 1610,191.57 1610,265 ; J1.172@2175.16,935 1805,935 1610,740 1610,410 1580,380 1580,345 1610,315 1610,265
  Bottom Layer w10: v1(1526.23,290.17) 1532.54,290.17 1532.71,290 1535.71,293 v1(1584,293)
USB_DM: IC2.4 J1.167 | length 431.6
  Top Layer w10: J1.167@2435,970.43 2435.42,970.86 2584.14,970.86 2620,935 2785,935 2804.68,954.68 IC2.4@2804.68,993.39
USB_DP: IC2.3 J1.165 | length 405.8
  Top Layer w10: J1.165@2435,994.06 2585.94,994.06 2630,950 2775,950 2785,960 IC2.3@2785,993.39
USBSTATE: DS7.2 Q1.2 Q2.3 | length 199.8
  Top Layer w10: Q2.3@2665,1584.41 2714.41,1584.41 ; DS7.2@2695,1484.53 2695,1565 2714.41,1584.41 ; Q1.2@2754.41,1590.31 2752.24,1590.31 2746.34,1584.41 2714.41,1584.41
VBUSA: C30.2 C31.2 D1.1 R20.1 TP4.1 USBA.1 | length 1291.1
  Top Layer w10: v1(2970,1220) 2970,1160.47 R20.1@2969.53,1160 3031.85,1160 C31.2@3036.85,1155 C30.2@3036.85,1040 ; v1(2970,1340) 2970,1450 3120,1600 ; D1.1@3120,1521.73 3120,1600 ; TP4.1@3260,1510 3260,1740 ; USBA.1@3274.17,1832.2 3274.17,1754.17 3260,1740 ; 3120,1600 3260,1740
  Bottom Layer w10: v1(2970,1220) v1(2970,1340)
VBUSB: D4.1 Q3.1 R22.2 TP5.1 USBB.1 USBBOOT.3 | length 1167.8
  Top Layer w10: Q3.1@2989.68,910.59 3109.09,910.59 R22.2@3110,909.69 3439.69,909.69 ; TP5.1@3355,795 3362.46,802.46 3362.46,832.46 3439.69,909.69 ; D4.1@3420,1201.73 3420.98,1201.73 3426.81,1207.56 3426.81,1208.54 3454.19,1235.93 3530.93,1235.93 ; USBB.1@3608.94,1235.93 3530.93,1235.93 ; 3439.69,909.69 USBBOOT.3@3500,970 3500,1205 3530.93,1235.93
XC_TCK: P1.4 U1.48 U2.4 | length 822.6
  Top Layer w10: P1.4@215,1990 450,1990 ; U2.4@474.41,2042.6 474.41,2014.41 450,1990 ; U1.48@948.74,2053.15 923.31,2053.15 922.91,2052.75 865.15,2052.75 802.4,1990 450,1990
XC_TDI: P1.1 U1.45 U2.1 | length 879.3
  Top Layer w10: P1.1@215,2290 440,2290 526.63,2203.37 526.63,2168.37 ; U2.1@525.59,2117.4 525.59,2167.32 526.63,2168.37 ; U1.45@948.74,2112.2 582.8,2112.2 526.63,2168.37
XC_TDO: P1.2 U1.83 U2.3 | length 1440.7
  Top Layer w10: P1.2@215,2190 415,2190 ; v1(460,2190) 415,2190 ; U2.3@474.41,2117.4 471.54,2120.27 471.54,2133.46 415,2190 ; v1(1450,2150) 1514.25,2150 1515.83,2151.57 U1.83@1541.26,2151.57
  Bottom Layer w10: v1(460,2190) 1410,2190 v1(1450,2150)
XC_TMS: P1.3 U1.47 U2.5 | length 784.5
  Top Layer w10: P1.3@215,2090 225,2080 485,2080 ; U2.5@500,2042.6 500,2065 485,2080 ; U1.47@948.74,2072.83 867.17,2072.83 860,2080 485,2080
pads on no net: HDMIPORT.14 IC1.6 J1.4 J1.6 J1.10 J1.12 J1.16 J1.18 J1.22 J1.24 J1.33 J1.35 J1.45 J1.69 J1.71 J1.75 J1.77 J1.93 J1.94 J1.95 J1.96 J1.99 J1.100 J1.101 J1.102 J1.105 J1.106 J1.107 J1.108 J1.112 J1.114 J1.118 J1.120 J1.124 J1.126 J1.128 J1.130 J1.132 J1.135 J1.136 J1.137 J1.138 J1.141 J1.142 J1.143 J1.144 J1.147 J1.148 J1.149 J1.150 J1.153 J1.154 J1.155 J1.156 J1.158 J1.159 J1.160 J1.161 J1.162 J1.166 J1.179 J1.MH1 J1.MH2 J2.MH1 J2.MH2 JTAG.MP1 JTAG.MP2 U1.1 U1.2 U1.3 U1.4 U1.6 U1.15 U1.23 U1.24 U1.25 U1.27 U1.33 U1.34 U1.35 U1.36 U1.37 U1.39 U1.40 U1.41 U1.42 U1.43 U1.46 U1.49 U1.50 U1.52 U1.53 U1.54 U1.55 U1.56 U1.58 U1.59 U1.60 U1.61 U1.63 U1.64 U1.66 U1.67 U1.70 U1.74 U1.87 U1.95 U1.96 U1.97 U2.6 U4.5 U4.6 U5.B1 U8.5 U8.6 U9.1 U9.3 USBB.4

## Polygon pours and split planes (outlines as drawn)
GND on Bottom Layer "NONET_L04_P000" (solid, shelved, pour order 0): 25,3625 30,3625 95,3690 3675,3690 3765,3600 3765,65 3720,20 70,20 25,65

## Silkscreen, mask and mechanical layers (free items; w line width, h text height)
Top Overlay:
  text "RAS PI COMPUTE MOD  / I/O TEST BOARD / RPL 2020" at 2640,3425 h60

## Text inside footprints (layer, text, board x,y; h text height)
HDMIPORT: Top 3D Body "PCB Edge" at 123.5,1373.3 h24 r270
JTAG: Top Overlay "8" at 1750.55,192.76 h40; Top Overlay "1" at 1557.64,192.76 h40
USBA: Top 3D Body "PCB Edge" at 3833.62,1883.39 h32 r90
USBB: Mechanical 1 "PCB Edge" at 3776.85,1461.32 h29.53 r90